# Altium PCB usbTottl_V03.PcbDoc
Units mil, origin at the board's own origin, x right, y up, seen from the top; angles counter-clockwise.
Board outline 1970.04 x 1182.13 mil, 2 copper layers (Top Layer, Bottom Layer); 50 components, 53 nets, 215 pads, 99 vias.
Unrouted connection lines stored in the file: 36.
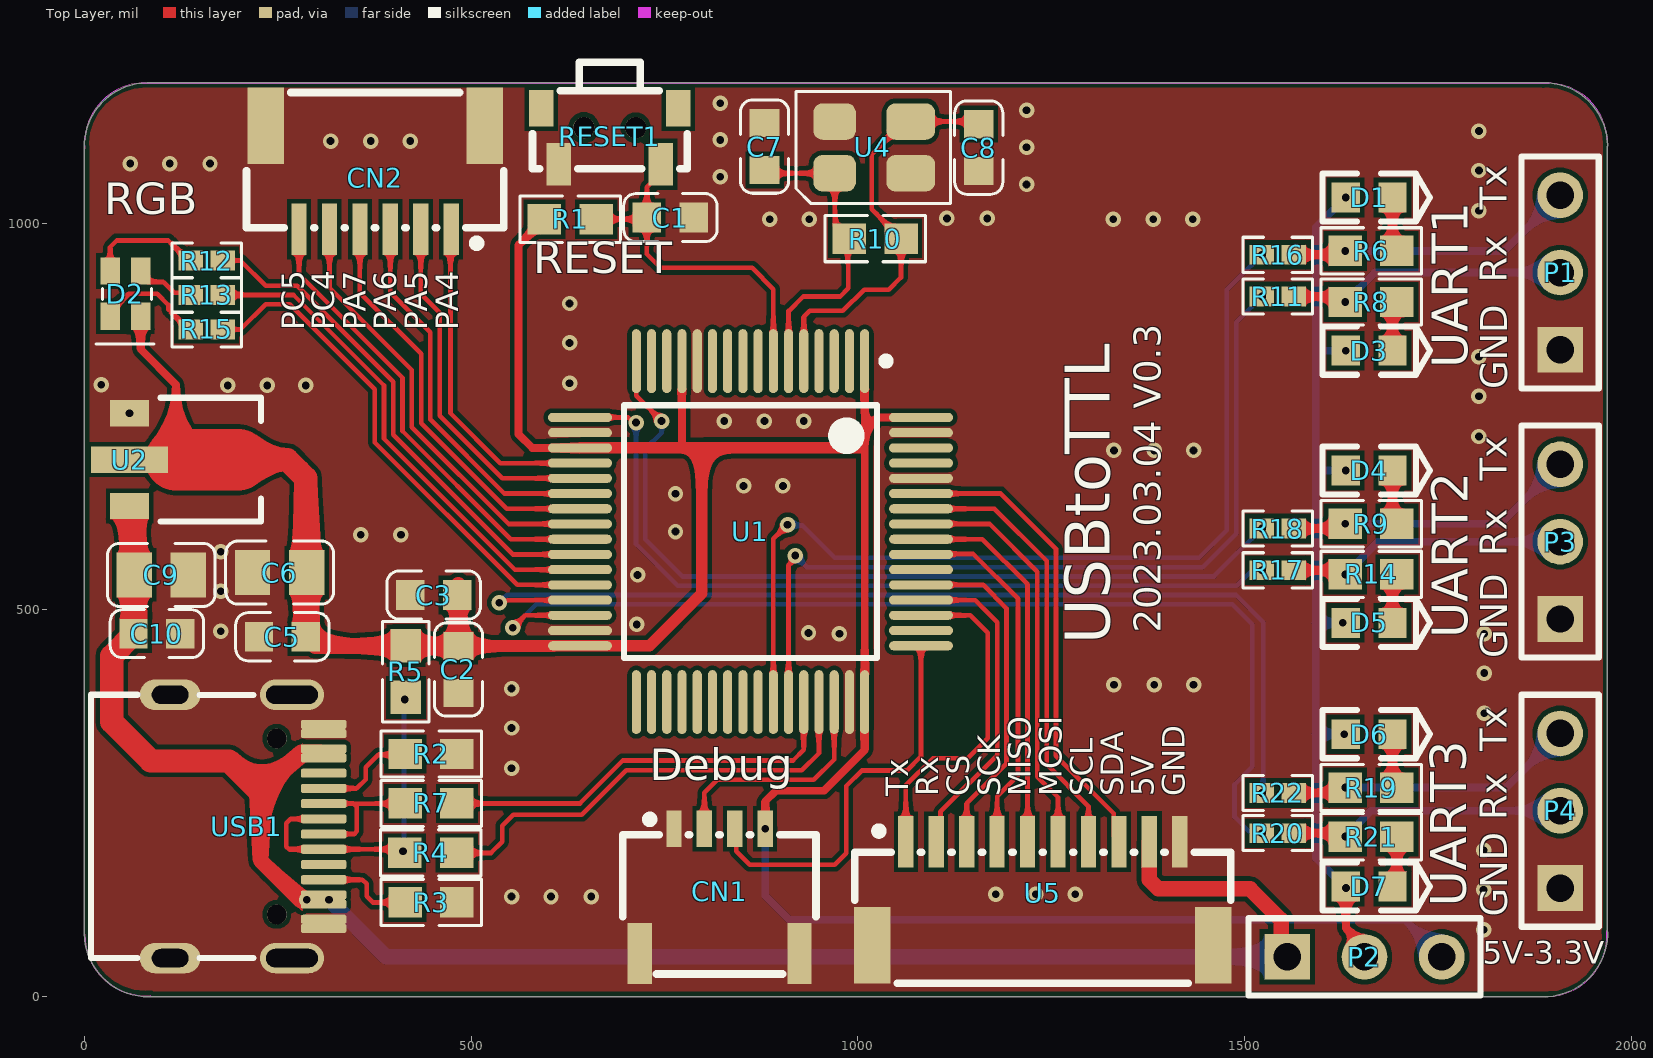
[diagram p0: Top Layer view]
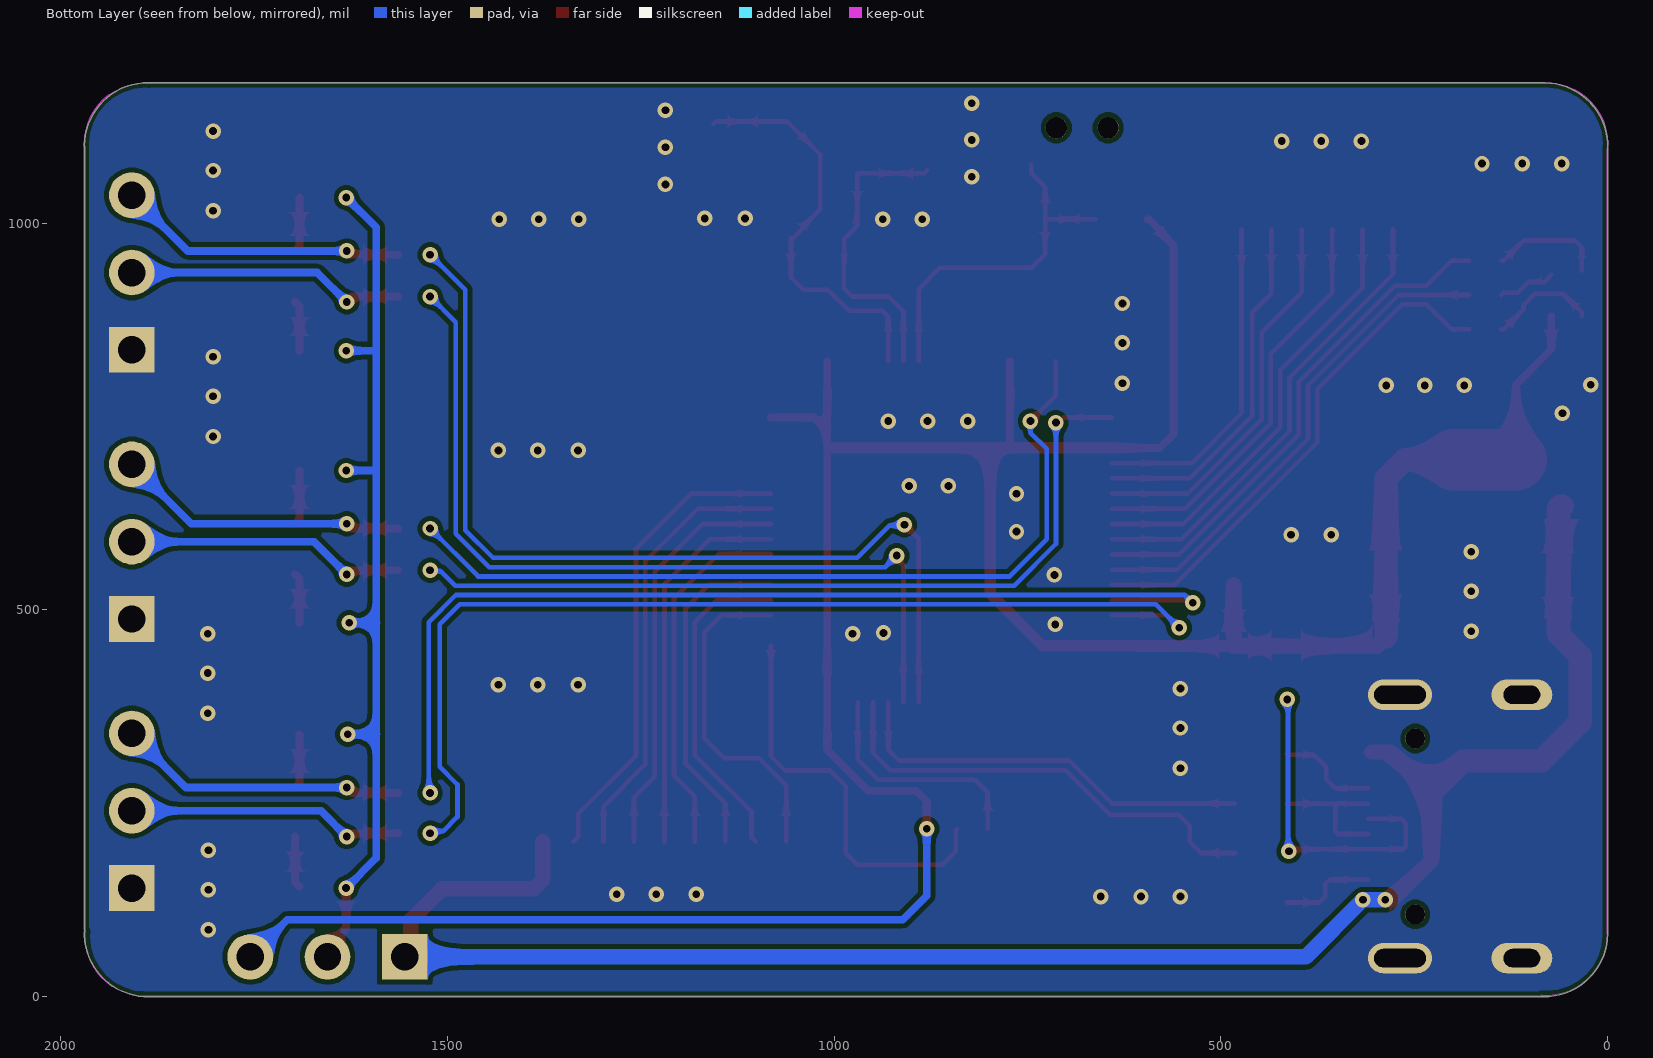
[diagram p1: Bottom Layer view, seen from below]
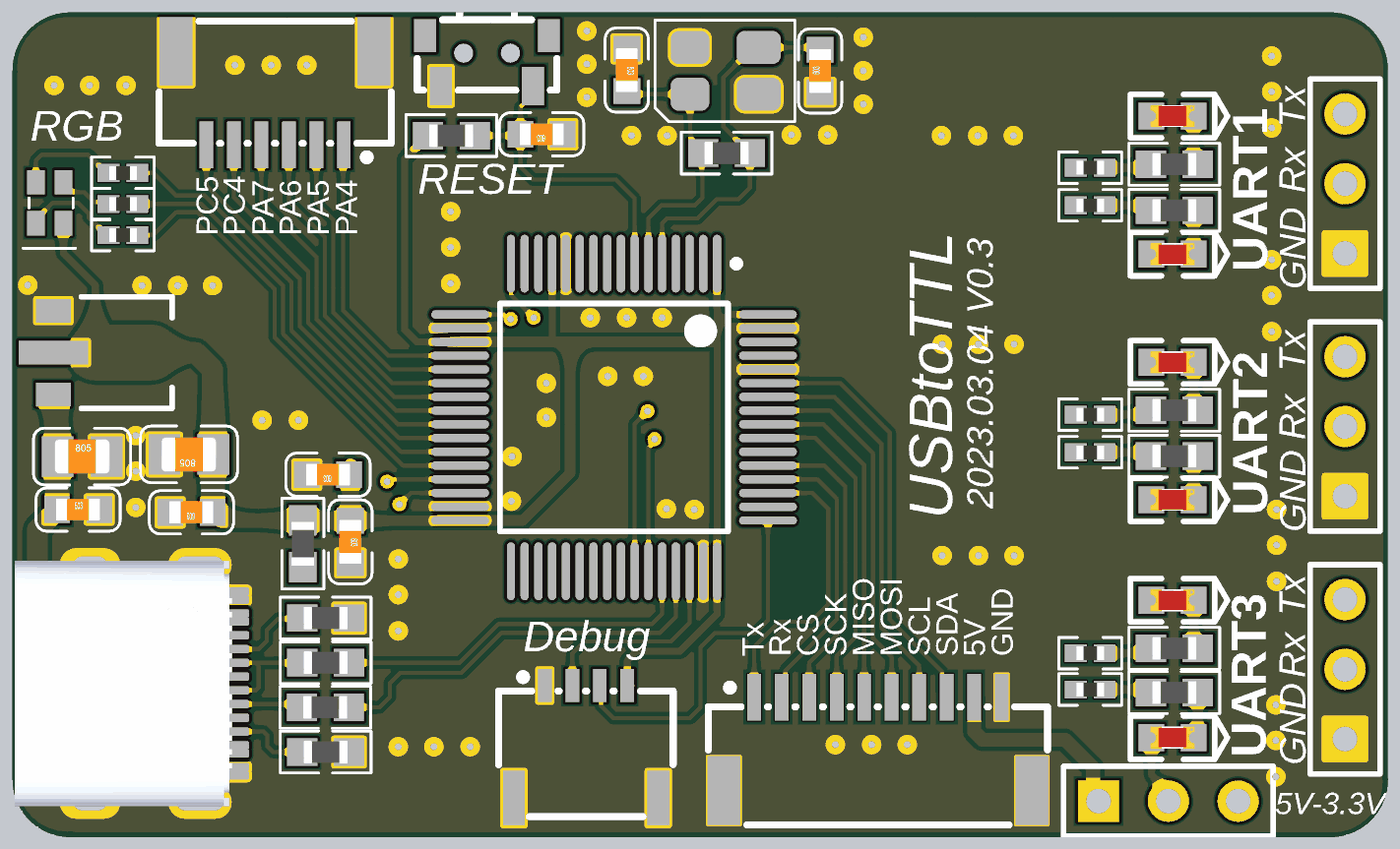
[diagram p2: 3D render of the assembled board from above, using the file's embedded part models]

## Layer stack, top to bottom
Top Solder: solder mask 0.4, Solder Resist, Dk 3.5
Top Layer: signal copper 1.4
Dielectric 1: dielectric 12.6, FR-4, Dk 4.8
Bottom Layer: signal copper 1.4
Bottom Solder: solder mask 0.4, Solder Resist, Dk 3.5

## Board outline
-0.51,80.99 ccw(c82,82) 83,-0.52 ccw(c83,-0.27) 83.01,-0.51 1892,-0.51 ccw(c1892,0) 1892.38,-0.35 ccw(c1887,82) 1968.87,71.64 ccw(c1968.5,72) 1969.02,72 1969.02,72.91 ccw(c1887,82) 1969.52,82 ccw(c1889.62,82.02) 1969.51,83.01 ccw(c1969,83) 1969.02,83.51 1969.02,1099.49 ccw(c1969,1100) 1969.51,1100 ccw(c1887,1099) 1886.3,1181.52 ccw(c1886,1181.1) 1886,1181.62 81,1181.62 ccw(c81,1181.1) 80.69,1181.51 ccw(c82,1099) -0.51,1098

## Design rules (kind name [scope] priority, off if disabled: settings)
Clearance [All] p1: gap=6 ignorepadtopadclearanceinfootprint=FALSE
PolygonConnect [All] p1: connectstyle=Direct reliefconductorwidth=10 reliefentries=4 polygonreliefangle="90 Angle" airgapwidth=10
RoutingVias [All] p1: holewidth=28 width=50 viastyle="Through Hole" minholewidth=28 minwidth=50 maxholewidth=28 maxwidth=50
SolderMaskExpansion [All] p1: expansion=4 istentingtop=FALSE
Width [All] p1: maxlimit=30 minlimit=6 preferedwidth=6
30 further rules are at their usual default settings.

## Components (designator, comment, footprint, x,y, rotation, side; value= is the part's Value field where it differs from the comment)
C1 "Cap" 0603_C 757.31,1007 r180 top value=100nF
C2 "Cap" 0603_C 483.31,422.69 r270 top value=100nF
C3 "Cap" 0603_C 451.31,519 r180 top value=100nF
C5 "Cap" 0603_C 255.69,465 r180 top value=10uF
C6 "Cap" 0805_C 252.04,548 r180 top value=100nF
C7 "Cap" 0603_C 879.21,1098.98 r270 top value=10pF
C8 "Cap" 0603_C 1156.21,1097.67 r90 top value=10pF
C9 "Cap" 0805_C 99.04,545 r0 top value=100nF
C10 "Cap" 0603_C 93.31,469 r0 top value=10uF
CN1 "HDGC1002WR-S-4P" SH1.0_4P 821,136 r0 top
CN2 "WAFER-SH1.0-6PWB" SH1.0_6P 375.58,1058.93 r180 top
D1 "LED0" led-0603 1660.94,1033 r180 top
D2 "LED_GRB" LED_RGB 54.62,908.5 r90 top
D3 "LED0" led-0603 1660.94,835 r180 top
D4 "LED0" led-0603 1660.94,680 r180 top
D5 "LED0" led-0603 1660.94,483 r180 top
D6 "LED0" led-0603 1660.94,339 r180 top
D7 "LED0" led-0603 1660.94,142 r180 top
P1 "Header 3" HDR3X1_2.54 1908,836 r90 top
P2 "Header 3" HDR3X1_2.54 1555,51 r0 top
P3 "Header 3" HDR3X1_2.54 1908,488 r90 top
P4 "Header 3" HDR3X1_2.54 1908,140 r90 top
R1 "Res1" 0603_R 628,1005 r0 top value=10K
R2 "5.1K" 0603_R 447.96,313.42 r0 top value=22R
R3 "5.1K" 0603_R 447.96,121.42 r0 top value=22R
R4 "" 0603_R 447.5,185.42 r0 top value=10R
R5 "" 0603_R 415.31,420 r270 top value=1.5K
R6 "" 0603_R 1663.54,963.93 r180 top value=4.7K
R7 "" 0603_R 447.96,249.42 r180 top value=10R
R8 "" 0603_R 1663.54,897.93 r180 top value=4.7K
R9 "" 0603_R 1663.54,611.26 r180 top value=4.7K
R10 "Res1" 0603_R 1022.21,979.98 r0 top value=1M
R11 "" "0402_R - M" 1543,905 r0 top value=10R
R12 "Res1" "0402_R - M" 157.67,951.5 r180 top value=1.5K
R13 "Res1" "0402_R - M" 157.67,907 r180 top value=1.5K
R14 "" 0603_R 1663.54,545.6 r180 top value=4.7K
R15 "Res1" "0402_R - M" 157.67,862.5 r180 top value=1.5K
R16 "" "0402_R - M" 1543,959 r0 top value=10R
R17 "" "0402_R - M" 1543,551 r0 top value=10R
R18 "" "0402_R - M" 1543,605 r0 top value=10R
R19 "" 0603_R 1663.54,270 r180 top value=4.7K
R20 "" "0402_R - M" 1543,211 r0 top value=10R
R21 "" 0603_R 1663.54,206.6 r180 top value=4.7K
R22 "" "0402_R - M" 1543,263 r0 top value=10R
RESET1 "TACT 2P" SW-SMD_2*4 679.06,1124.44 r0 top value=3x4
U1 "STM32F103RET6" LQFP-64 861,601 r270 top
U2 "AMS1117-3.3S" SOT-89 58,754 r270 top
U4 "OSC" SMD_3225_4P 969.77,1064.39 r0 top
U5 "WAFER-SH1.0-10PWB" SH1.0_10P 1239,133.06 r0 top
USB1 "TYPE-C-16PIN" Type-C-16Pin 209.71,219.7 r180 top

## Footprints (in the part's own frame and the unit in brackets; to place one, negate y for a bottom-side part, rotate by r counter-clockwise, add the part's x,y. Pads: shape width x height; smd on the part's side, far side on the other; paste and mask are expansions set on the pad)
"0402_R - M" [mm]
  rect 0.8x0.65 smd mask+0.051: 1(-0.525,0) 2(0.525,0)
  silkscreen extent -1.14,-0.58 1.14,0.58, body extent -0.5,-0.25 0.5,0.25, height 0.35
0603_C [mm]
  rect 0.93x0.98 smd: 1(-0.77,0) 2(0.77,0)
  silkscreen extent -1.54,-0.79 1.54,0.79, body extent -0.8,-0.4 0.8,0.4, height 0.3
0603_R [mm] "贴片带丝印"
  rect 1.1x1 smd: 1(-0.85,0) 2(0.85,0)
  silkscreen extent -1.65,-0.76 1.65,0.76, body extent -0.82,-0.41 0.83,0.41, height 0.46
0805_C [mm]
  rect 1.16x1.47 smd: 1(-0.89,0) 2(0.89,0)
  silkscreen extent -1.77,-1.04 1.77,1.04, body extent -1,-0.62 1,0.63, height 0.77
HDR3X1_2.54 [mm] "2.54mm"
  rect 1.5x1.5 hole 0.9: 1(0,0)
  round 1.5 hole 0.9: 2(2.54,0) 3(5.08,0)
  silkscreen extent -1.27,-1.27 6.35,1.27
led-0603 [mm] "贴片带丝印"
  rect 0.93x0.98 smd: 1(0.77,0) 2(-0.77,0)
  silkscreen extent -2,-0.79 1.54,0.79, body extent -0.8,-0.4 0.8,0.4, height 0.6
LED_RGB [mil] "0603_L1.6-W1.6-BL-RD"
  rect 35x25 smd: 1(-29,21.72) 2(-29,-17.72) 3(29.62,-17.72) 4(29.62,21.72)
  silkscreen extent -65,-35 7,40
LQFP-64 [mm] "LQFP64"
  oval 2.1x0.3 smd: 1(-5.6,3.75) 2(-5.6,3.25) 3(-5.6,2.75) 4(-5.6,2.25) 5(-5.6,1.75) 6(-5.6,1.25) 7(-5.6,0.75) 8(-5.6,0.25) 9(-5.6,-0.25) 10(-5.6,-0.75) 11(-5.6,-1.25) 12(-5.6,-1.75) 13(-5.6,-2.25) 14(-5.6,-2.75) 15(-5.6,-3.25) 16(-5.6,-3.75) 33(5.6,-3.75) 34(5.6,-3.25) 35(5.6,-2.75) 36(5.6,-2.25) 37(5.6,-1.75) 38(5.6,-1.25) 39(5.6,-0.75) 40(5.6,-0.25) 41(5.6,0.25) 42(5.6,0.75) 43(5.6,1.25) 44(5.6,1.75) 45(5.6,2.25) 46(5.6,2.75) 47(5.6,3.25) 48(5.6,3.75)
  oval 0.3x2.1 smd: 17(-3.75,-5.6) 18(-3.25,-5.6) 19(-2.75,-5.6) 20(-2.25,-5.6) 21(-1.75,-5.6) 22(-1.25,-5.6) 23(-0.75,-5.6) 24(-0.25,-5.6) 25(0.25,-5.6) 26(0.75,-5.6) 27(1.25,-5.6) 28(1.75,-5.6) 29(2.25,-5.6) 30(2.75,-5.6) 31(3.25,-5.6) 32(3.75,-5.6) 49(3.75,5.6) 50(3.25,5.6) 51(2.75,5.6) 52(2.25,5.6) 53(1.75,5.6) 54(1.25,5.6) 55(0.75,5.6) 56(0.25,5.6) 57(-0.25,5.6) 58(-0.75,5.6) 59(-1.25,5.6) 60(-1.75,5.6) 61(-2.25,5.6) 62(-2.75,5.6) 63(-3.25,5.6) 64(-3.75,5.6)
  silkscreen extent -5.72,-4.15 4.15,4.58, body extent -5,-5 5,5, height 1.6
SH1.0_4P [mm] "SH1.0 4P 卧贴"
  rect 0.5x1.2 smd: 1(-1.5,2.05) 2(-0.5,2.05) 3(0.5,2.05) 4(1.5,2.05)
  rect 0.8x2 smd: 5(2.625,-2.05) 6(-2.625,-2.05)
  silkscreen extent -3.18,-2.72 3.17,2.48
SH1.0_6P [mm] "SH1.0 6P 卧贴"
  rect 0.5x1.7 smd: 1(-2.5,1.7) 2(-1.5,1.7) 3(-0.5,1.7) 4(0.5,1.7) 5(1.5,1.7) 6(2.5,1.7)
  rect 1.2x2.5 smd: 7(3.6,-1.7) 8(-3.6,-1.7)
  silkscreen extent -4.22,-2.79 4.22,2.29
SH1.0_10P [mm]
  rect 0.5x1.7 smd mask+0.05: 1(-4.5,1.7) 2(-3.5,1.7) 3(-2.5,1.7) 4(-1.5,1.7) 5(-0.5,1.7) 6(0.5,1.7) 7(1.5,1.7) 8(2.5,1.7) 9(3.5,1.7) 10(4.5,1.7)
  rect 1.2x2.5 smd mask+0.05: 11(5.6,-1.7) 12(-5.6,-1.7)
  silkscreen extent -6.17,-2.95 6.17,2.18
SMD_3225_4P [mm] "无源4脚晶振"
  rrect50% 1.4x1.2 smd: 1(0,0) 4(0,1.7)
  rrect50% 1.6x1.2 smd: 2(2.5,0) 3(2.5,1.7)
  silkscreen extent -1.27,-1 3.81,2.69
SOT-89 [mil] "AMS1117-3.3S"
  rect 34x50 smd: 1(0,0) 3(120,0)
  rect 34x100 smd: 2(60,0)
  Top Layer lines w80: 60,60 60,140
  silkscreen extent -20,40 140,170
SW-SMD_2*4 [mm] "侧按2*4"
  rect 0.8x1.4 smd: 1(-1.675,-1.23) 2(1.675,-1.23)
  rect 0.8x1.2 smd: 3(-2.25,0.605) 4(2.25,0.605)
  round 0.7 hole 0.7 unplated: ""(-0.85,-0.03) ""(0.85,-0.03)
  silkscreen extent -2.54,-1.38 2.54,2.12
Type-C-16Pin [mm]
  round 0.65 hole 0.65: 0(-0.98,2.89) 0(-0.98,-2.89)
  oval 2x1 hole 0.6 slot 1.2 at 0 deg: 1(2.52,4.325) 2(2.52,-4.325)
  oval 2.1x1 hole 0.6 slot 1.7 at 0 deg: 3(-1.48,-4.325) 4(-1.48,4.325)
  rrect50% 1.5x0.3 smd: A1(-2.52,-3.35) A4(-2.52,-2.55) A5(-2.52,-1.25) A6(-2.52,-0.25) A7(-2.52,0.25) A8(-2.52,1.25) A9(-2.52,2.55) A12(-2.52,3.35) B1(-2.52,3.05) B4(-2.52,2.25) B5(-2.52,1.75) B6(-2.52,0.75) B7(-2.52,-0.75) B8(-2.52,-1.75) B9(-2.52,-2.25) B12(-2.52,-3.05)
  silkscreen extent -0.22,-4.33 5.12,4.33, body extent -2.64,-4.48 5.26,4.46, height 3.28

## Part data
C1 C7 C8: "Capacitor", LatestRevisionDate=17-Jul-2002, LatestRevisionNote="Re-released for DXP Platform.", PackageDescription="Radial Cap, Thru-Hole; 2 Leads; 0.3 in Pin Spacing", PackageReference=RAD-0.3, Published=8-Jun-2000, Publisher="Altium Limited"
C2 C3 C5 C6 C9 C10: "无极性电容", LatestRevisionDate=17-Jul-2002, LatestRevisionNote="Re-released for DXP Platform.", PackageReference=RAD-0.3, Published=8-Jun-2000, Publisher="Altium Limited"
CN1: BOM_JLCPCB Part Class="Extended Part", BOM_Manufacturer=HDGC(华德共创), BOM_Manufacturer Part=HDGC1002WR-S-4P, BOM_Supplier=LCSC, BOM_Supplier Part=C2936214, Contributor=LCSC, spicePre=C, spiceSymbolName=HDGC1002WR-S-4P
CN2: BOM_JLCPCB Part Class="Extended Part", BOM_Manufacturer=XUNPU(讯普), BOM_Manufacturer Part=WAFER-SH1.0-6PWB, BOM_Supplier=LCSC, BOM_Supplier Part=C3029345, Contributor=lcsc, link=https://atta.szlcsc.com/upload/public/pdf/source/20220527/1879B8210BD3B2006BCEAC1A40D397B6.pdf, spicePre=C, spiceSymbolName=WAFER-SH1.0-6PWB
D1 D3 D4 D5 D6 D7: "发光二极管", LatestRevisionDate=08-Jul-2005, LatestRevisionNote="Mech Layer 1 removed.", PackageReference=LED-0, Published=8-Jun-2000, Publisher="Altium Limited"
D2: library part LED_RGB, "共阳三色LED"
P1 P2 P3 P4: "接插件", LatestRevisionDate=17-Jul-2002, LatestRevisionNote="Re-released for DXP Platform.", Publisher="Altium Limited"
R1 R10: "贴片电阻", LatestRevisionDate=17-Jul-2002, LatestRevisionNote="Re-released for DXP Platform.", PackageReference=AXIAL-0.4, Published=8-Jun-2000, Publisher="Altium Limited"
R2 R3: library part 电阻-0402, "Resistor"
R4 R5 R6 R7 R8 R9 R11 R14 R16 R17 R18 R19 R20 R21 R22: library part Res2, "Resistor", LatestRevisionDate=17-Jul-2002, LatestRevisionNote="Re-released for DXP Platform.", PackageReference=AXIAL-0.4, Published=8-Jun-2000, Publisher="Altium Limited"
R12 R13 R15: library part Res, "贴片电阻", LatestRevisionDate=17-Jul-2002, LatestRevisionNote="Re-released for DXP Platform.", PackageReference=AXIAL-0.4, Published=8-Jun-2000, Publisher="Altium Limited"
RESET1: library part ButtonTACT_3x4x2_180, "Button", Type="TACT 2P"
U1: "STM32F103RET6单片机64引脚"
U2: "SOT-89"
U4: library part SMD-2520, "四脚无源晶振"
U5: Current Rating (Max)=1A, JLCPCB Part Class="Extended Part", LCSC Part Name="1mm 1x10P 卧贴", Manufacturer=XUNPU(讯普), Operating Temperature Range=-25℃~+85℃, Add into BOM=yes, Convert to PCB=yes, Datasheet=https://atta.szlcsc.com/upload/public/pdf/source/20220527/1879B8210BD3B2006BCEAC1A40D397B6.pdf, Device=WAFER-SH1.0-10PWB, Gender=公型插针, Manufacturer Part=WAFER-SH1.0-10PWB, Mounting Style=卧贴, Name=WAFER-SH1.0-10PWB, Number of PINs Per Row=10, Number of Rows=1, Pins Structure=1x10P, Pitch=1mm, Supplier=LCSC, Supplier Footprint=SMD,P=1mm, Supplier Part=C3029349, Symbol=WAFER-SH1.0-10PWB
USB1: library part TYPE-C16PIN, BOM_Manufacturer="SHOU HAN", BOM_Manufacturer Part=TYPE-C16PIN, BOM_Supplier=LCSC, BOM_Supplier Part=C393939, Contributor=LCSC, spicePre=U, spiceSymbolName=TYPE-C16PIN

## Via types
v1: diameter 20, hole 10, Top Layer to Bottom Layer, 99 vias

## Nets (pads, with @x,y where several pads share a name; then routed paths per layer and width w, separated by ;. In a path a pad name is that pad's centre, name@x,y a point inside that pad or via, vN(x,y) a via of type N, cw(c..) or ccw(c..) an arc to the next point about the centre after c; other vN are vias at no path point)
GND: C1.1 C2.2 C3.2 C5.2 C6.2 C7.1 C8.1 C9.2 C10.2 CN1.1 CN1.5 CN1.6 CN2.7 CN2.8 P1.1 P3.1 P4.1 R2.2 R3.2 RESET1.1 U1.12 U1.18 U1.31 U1.47 U1.60 U1.63 U2.1 U4.2 U4.4 U5.10 U5.11 U5.12 USB1.1 USB1.2 USB1.3 USB1.4 USB1.A1 USB1.A12 USB1.B1 USB1.B12
  other v1: 1809,86 552,129 603,129 655,129 1178,132 1230,132 1281,132 1809,138 1809,189 552,295 552,347 1810,366 552,398 1331,403 1383,403 1434,403 1810,418 976,469 1810,469 936,470 176,472 714,481 176,524 715,545 176,575 357,597 409,597 764,601 764,650 852,660 903,660 1331,706 1383,706 1434,706 1803,724 827,744 879,744 930,744 58,754 1803,776 185,790 236,790 286,790 21.23,790.77 627,793 1803,827 627,845 627,896 886,1005 937,1005 1330,1005 1382,1005 1433,1005 1115,1006 1167,1006 1803,1016 1218,1050 822,1060 1803,1068 59,1077 110,1077 162,1077 1218,1098 318,1106 370,1106 421,1106 822,1107.5 1803,1119 1218,1146 822,1155
I2C_SCL: U1.58 U5.7 | length 575.9
  Top Layer w6: U1.58 1176.47,630.53 1244,563 1244,300 1298.05,245.95 U5.7
I2C_SDA: U1.59 U5.8 | length 616.8
  Top Layer w6: U1.59 1184.79,650.21 1256,579 1256,311 1330.59,236.41 1330.59,206.84 U5.8
LED_B: R13.1 U1.27 | length 649.6
  Top Layer w6: R13.1 269.97,907 387,789.97 387,721.21 556.42,551.79 U1.27
LED_G: R12.1 U1.26 | length 659.9
  Top Layer w6: R12.1 201.5,951.5 234,919 274.94,919 399,794.94 399,726.18 553.7,571.47 U1.26
LED_R: R15.1 U1.28 | length 666.2
  Top Layer w6: R15.1 201.5,862.5 234,895 265,895 375,785 375,716.24 559.13,532.1 U1.28
MCU_U1_Rx: R11.1 U1.43 | length 1108
  Top Layer w6: U1.43 910.11,380.63 910.11,557.32 919,566.21 v1(919,570)
  Bottom Layer w6: v1(919,570) 934,555 1445.97,555 1489,598.03 1489,871.67 v1(1522.33,905)
MCU_U1_Tx: R16.1 U1.42 | length 1212.6
  Top Layer w6: U1.42 890.53,591.53 v1(909,610)
  Bottom Layer w6: v1(909,610) 910,609 928,609 970,567 1441,567 1477,603 1477,913.67 v1(1522.33,959)
MCU_U2_Rx: R17.1 U1.17 | length 1072.2
  Top Layer w6: U1.17 702.57,748.64 709.21,742 v1(713,742)
  Bottom Layer w6: v1(713,742) 713,585 767,531 1490,531 1508.73,549.73 1521.06,549.73 v1(1522.33,551)
MCU_U2_Tx: R18.1 U1.16 | length 1095.6
  Top Layer w6: U1.16 713.36,776.64 v1(746,744)
  Bottom Layer w6: v1(746,744) 746,729 725,708 725,591 773,543 1460.33,543 v1(1522.33,605)
MCU_U3_Rx: R20.1 U1.30 | length 1376.2
  Top Layer w6: v1(553.5,476.5) 569.73,492.73 U1.30
  Bottom Layer w6: v1(553.5,476.5) 584,507 1484.03,507 1510.01,481.01 1510.01,297.01 1487,274 1487,232 1505.32,213.68 1519.65,213.68 v1(1522.33,211)
MCU_U3_Tx: R22.1 U1.29 | length 1334.3
  Top Layer w6: v1(536,509) 538.68,511.68 545.78,511.68 546.51,512.42 U1.29
  Bottom Layer w6: v1(536,509) 536.51,509 546.51,519 1489,519 1524,484 1524,264.67 v1(1522.33,263)
mUSB_D+: R4.1 R5.2 USB1.A6 USB1.B6 | length 434.5
  Top Layer w6: USB1.A6 266.62,229.54 260.75,223.67 260.75,193.68 264.27,190.17 USB1.B6 409.29,190.17 v1(411.66,187.8) R4.1
  Bottom Layer w6: v1(411.66,187.8) 412.83,188.96 412.83,382.83 v1(414,384)
mUSB_D-: R7.2 USB1.A7 USB1.B7 | length 187.7
  Top Layer w6: USB1.A7 348.42,209.85 351.93,213.37 351.93,244.99 347.7,249.22 ; USB1.B7 347.7,249.22 ; R7.2 414.3,249.22 347.7,249.22
NetC1_2: C1.2 R1.2 RESET1.2 U1.7 | length 465.2
  Top Layer w6: R1.2 725,1005 C1.2 ; RESET1.2 745,1064.19 727,1046.19 C1.2 ; U1.7 890.53,914.47 863,942 745,942 727,960 C1.2
NetD1_2: D1.2 R6.1 | length 71.5
  Top Layer w10: D1.2 1691.25,969.68 R6.1
NetD2_1: D2.1 R15.2 | length 141.5
  Top Layer w6: D2.1 32.9,884.5 56.9,908.5 93.82,908.5 108.34,893.99 108.34,888.21 124.25,872.3 134.05,862.5 R15.2
NetD2_3: D2.3 R13.2 | length 75.5
  Top Layer w6: D2.3@72.34,933.12 81.84,923.62 102.22,923.62 115.77,910.07 133.93,910.07 R13.2
NetD2_4: D2.4 R12.2 | length 149.3
  Top Layer w6: D2.4 32.9,969.07 41.34,977.5 108.05,977.5 134.05,951.5 R12.2
NetD3_2: D3.2 R8.1 | length 65.3
  Top Layer w10: D3.2 1691.25,892.18 R8.1
NetD4_2: D4.2 R9.1 | length 71.1
  Top Layer w10: D4.2 1691.25,617.01 R9.1
NetD5_2: D5.2 R14.1 | length 65
  Top Layer w10: D5.2 1691.25,539.85 R14.1
NetD6_2: D6.2 R19.1 | length 71.4
  Top Layer w10: D6.2 1691.25,275.75 R19.1
NetD7_2: D7.2 R21.1 | length 67
  Top Layer w10: D7.2 1697,147.75 R21.1
NetR2_1: R2.1 USB1.A5 | length 133.4
  Top Layer w6: USB1.A5 351.99,268.91 363.5,280.42 363.5,296.42 379.5,312.42 413.5,312.42 R2.1
NetR3_1: R3.1 USB1.B5 | length 127.1
  Top Layer w6: USB1.B5 359.12,150.8 364.5,145.42 364.5,129.42 372.5,121.42 R3.1
PA4: CN2.1 U1.20 | length 432.2
  Top Layer w6: CN2.1@473,992 473,754 537.42,689.58 U1.20
PA5: CN2.2 U1.21 | length 466.2
  Top Layer w6: CN2.2 434.63,908.37 459,884 459,751.03 540.13,669.9 U1.21
PA6: CN2.3 U1.22 | length 500.6
  Top Layer w6: CN2.3 395.26,910.74 447,859 447,746.06 542.85,650.21 U1.22
PA7: CN2.4 U1.23 | length 535
  Top Layer w6: CN2.4 355.89,910.11 435,831 435,741.09 545.56,630.53 U1.23
PC4: CN2.5 U1.24 | length 569.4
  Top Layer w6: CN2.5 316.52,916.48 423,810 423,736.12 548.28,610.84 U1.24
PC5: CN2.6 U1.25 | length 603.8
  Top Layer w6: CN2.6 277.15,933.76 411,799.91 411,731.15 550.99,591.16 U1.25
SPI_CS: U1.53 U5.3 | length 446.3
  Top Layer w6: U1.53 1081.57,532 1162,532 1192,502 1192,301 1176,285 1140.57,249.57 U5.3
SPI_MISO: U1.56 U5.5 | length 494.7
  Top Layer w6: U1.56 1160.84,591.16 1219.31,532.69 U5.5
SPI_MOSI: U1.57 U5.6 | length 536.2
  Top Layer w6: U1.57 1170.16,610.84 1232,549 1232,284 1258.68,257.32 U5.6
SPI_SCK: U1.55 U5.4 | length 475
  Top Layer w6: U1.55 1082,572 1149,572 1207,514 1207,286 1179.94,258.94 U5.4
SWCLK: CN1.3 U1.49 | length 528.2
  Top Layer w6: CN1.3 842.4,214.99 842.4,187.6 860,170 970,170 985,185 985,272 1005,292 1063,292 1081.47,310.47 U1.49
SWDIO: CN1.2 U1.46 | length 306.6
  Top Layer w6: CN1.2 801.31,263.31 818,280 943,280 969.27,306.27 U1.46
UART4_RX: U1.52 U5.2 | length 426.9
  Top Layer w6: U1.52 1151.58,512.42 1180,484 1180,312 1106.62,238.62 1106.62,205.41 U5.2
UART4_TX: U1.51 U5.1 | length 436.3
  Top Layer w6: U5.1 1061.84,272.84 1097,308 1142,308 1168,334 1168,470 1145.27,492.73 U1.51
UART_RX1: P1.2 R8.2 R11.2 | length 363
  Top Layer w10: R11.2 1623,905 v1(1630.07,897.93)
  Bottom Layer w10: v1(1630.07,897.93) 1668.14,936 P1.2
UART_RX2: P3.2 R14.2 R17.2 | length 364.1
  Top Layer w10: R17.2 1624.67,551 v1(1630.07,545.6)
  Bottom Layer w10: v1(1630.07,545.6) 1672.48,588 P3.2
UART_RX3: P4.2 R20.2 R21.2 | length 360
  Top Layer w10: R20.2 1625.67,211 v1(1630.07,206.6)
  Bottom Layer w10: v1(1630.07,206.6) 1663.48,240 P4.2
UART_TX1: P1.3 R6.2 R16.2 | length 376.2
  Top Layer w10: R16.2 1625.14,959 v1(1630.07,963.93)
  Bottom Layer w10: v1(1630.07,963.93) 1835.93,963.93 P1.3
UART_TX2: P3.3 R9.2 R18.2 | length 378.7
  Top Layer w10: R18.2 1623.81,605 v1(1630.07,611.26)
  Bottom Layer w10: v1(1630.07,611.26) 1831.26,611.26 P3.3
UART_TX3: P4.3 R19.2 R22.2 | length 376.2
  Top Layer w10: R22.2 1623.07,263 v1(1630.07,270)
  Bottom Layer w10: v1(1630.07,270) 1838,270 P4.3
USB_D+: R4.2 U1.45 | length 600.2
  Top Layer w6: R4.2 525.42,185.42 540,200 540,220.69 554.31,235 642.97,235 700.28,292.31 927.31,292.31 949.58,314.58 U1.45
USB_D-: R7.1 U1.44 | length 538.9
  Top Layer w6: R7.1 640.42,249.42 696,305 916,305 929.9,318.9 U1.44
VCC_3.3V: C2.1 C3.1 C5.1 C6.1 CN1.4 D2.2 P2.3 R1.1 R5.1 U1.1 U1.13 U1.19 U1.32 U1.48 U1.64 U2.2 | length 3931.5
  Top Layer w10: D2.2 72.34,836.66 118,791 118,694 ; R1.1 592.57,1005 577.88,990.31 577.88,988.35 561,971.46 561,727 578.73,709.27 U1.19 ; 772,709.27 772.42,709.69 U1.13 ; v1(880.05,216.71) 880.05,252.05 894,266 956,266 1008.64,318.64 U1.48 1008.64,709.27 ; 1004.91,709.27 1008.64,713 1008.64,731.64 ; U1.1 1008.64,731.64 ; U1.64 1025.64,748.64 1008.64,731.64
  Top Layer w15: C2.1@484.3,453 U1.32@606.69,453 ; U1.32@608.28,453.36 730.36,453.36 798,521 798,709.27 ; U1.19 772,709.27 798,709.27 ; 1004.91,709.27 798,709.27
  Top Layer w20: C5.1 286,464.02 294.31,455.71 295.29,455.71 298,453 415.31,453 C2.1 ; C2.1@483.31,466 C3.1@483.31,532
  Top Layer w30: 198,694 262,694 276.99,679.01 286,670 C5.1
  Bottom Layer w10: v1(880.05,216.71) 880.05,129.95 911,99 1707,99 P2.3
VCC_5V: C9.1 C10.1 P2.1 U2.3 U5.9 USB1.A4 USB1.A9 USB1.B4 USB1.B9 | length 2376.6
  Top Layer w20: USB1.A9@280,123.4 227.5,175.89 227.5,263.5 280,316 USB1.A4@304.83,316 ; U5.9 1376.79,150.72 1388.51,139 1507,139 1547.19,98.81 1547.19,58.81 P2.1
  Top Layer w30: U2.3 61,634 63,632 C10.1 63,468.02 35,440.02 35,355 85.5,304.5 186.5,304.5 227.5,263.5
  Bottom Layer w20: v1(287,125) v1(316,125) 390,51 P2.1
VCC_BL: D1.1 D3.1 D4.1 D5.1 D6.1 D7.1 P2.2 | length 1168.9
  Top Layer w10: v1(1631,140) 1631,88.27 P2.2@1661.64,57.64
  Bottom Layer w10: 1593,835 v1(1630.62,835) ; v1(1627,483) 1592,483 ; v1(1629,339) 1592,339 ; v1(1630.62,680) 1593,680 1592,681 ; v1(1630.62,1033) 1592,994.38 1592,681 ; v1(1631,140) 1592,179 1592,339 ; 1592,339 1592,483 ; 1592,483 1592,681
XIN: C8.2 R10.2 U1.5 U4.3 | length 537.7
  Top Layer w6: U1.5 929.9,878.9 937.45,886.45 980.45,886.45 1008,914 1040,914 1055.67,929.67 R10.2 1053.71,979.98 1037.02,996.67 1037.02,998.64 1017.68,1017.98 1017.68,1088.68 1060.32,1131.32 U4.3 1152.87,1131.32 C8.2
XOUT: C7.2 R10.1 U1.6 U4.1 | length 402.7
  Top Layer w6: C7.2 883.49,1064.39 U4.1 970.09,1064.07 970.09,996.67 986.78,979.98 986.78,947.77 987.51,947.04 987.51,915.51 977,905 929,905 910.21,886.21 U1.6
pads on no net: RESET1. RESET1.3 RESET1.4 U1.2 U1.3 U1.4 U1.8 U1.9 U1.10 U1.11 U1.14 U1.15 U1.33 U1.34 U1.35 U1.36 U1.37 U1.38 U1.39 U1.40 U1.41 U1.50 U1.54 U1.61 U1.62 USB1.0 USB1.A8 USB1.B8

## Polygon pours and split planes (outlines as drawn)
GND on Top Layer "top_p" (solid, remove dead copper, pour order 0): 0,0 1966,0 1968,2 1968,1179 1966,1181 -4,1181 -6,1183
GND on Bottom Layer "bottom-p" (solid, remove dead copper, pour order 1): 0,0 1966,0 1967,1 1967,1180 -3,1180 -4,1181

## Keep-outs
Keep-Out Layer:
  lines w0.39: 71,1181 1894,1181 ; 74,0 1897,0 ; 78.99,1181.31 ccw(c78,1103) 0,1096 0,80.3 ccw(c78.31,79.31) 85.31,1.31 ; 1884,1181 cw(c1891,1103) 1969.31,1102.01 1969.31,86.31 ; 1889.01,-0.31 ccw(c1890,78) 1968,85

## Silkscreen, mask and mechanical layers (free items; w line width, h text height)
Top Overlay:
  text "Tx" at 1850.67,1017 h60 r90
  text "RGB" at 25,997.78 h70
  text "Rx" at 1850.67,923 h60 r90
  text "RESET" at 580,921.78 h70
  text "PC5" at 293.45,861.71 h50 r90
  text "PC4" at 332.21,861.71 h50 r90
  text "PA7" at 373.18,861.71 h50 r90
  text "PA6" at 412.5,861.71 h50 r90
  text "PA5" at 452.37,861.71 h50 r90
  text "PA4" at 492.79,861.71 h50 r90
  text "UART1" at 1804,812 h80 r90
  text "GND" at 1851.33,785 h60 r90
  text "Tx" at 1850.67,667 h60 r90
  text "Rx" at 1850.67,569 h60 r90
  text "2023.03.04 V0.3" at 1403.44,470.3 h60 r90
  text "UART2" at 1804,463 h80 r90
  text "USBtoTTL" at 1344.99,455.4 h100 r90
  text "GND" at 1851.33,437 h60 r90
  text "Tx" at 1850.67,317 h60 r90
  text "Debug" at 731,265.96 h70
  text "Tx" at 1075,258.71 h50 r90
  text "Rx" at 1113.76,258.71 h50 r90
  text "CS" at 1153.63,258.71 h50 r90
  text "SCK" at 1193.5,258.71 h50 r90
  text "MISO" at 1233.37,258.71 h50 r90
  text "MOSI" at 1273.24,258.71 h50 r90
  text "SCL" at 1313.11,258.71 h50 r90
  text "SDA" at 1352.98,258.71 h50 r90
  text "5V" at 1392.29,258.71 h50 r90
  text "GND" at 1432.16,258.71 h50 r90
  text "Rx" at 1850.67,228 h60 r90
  text "UART3" at 1802,116 h80 r90
  text "GND" at 1851.33,103 h60 r90
  text "5V-3.3V" at 1808,32.55 h50
Mechanical 1:
  lines w1: 81,1181 ccw(c82,1099) 0,1098 0,81 ccw(c82,82) 83,0 ; 81,1181.1 1886,1181.1 ; 1886,1181 cw(c1887,1099) 1969,1100 ; 1888,0 ccw(c1887,82) 1969,83 ; 1968.5,72 1968.5,1100

## Dimensions
0,81 to 1968.5,72 on Mechanical 1
81,1181.1 to 83,0 on Mechanical 1